# Altium PCB PCB1.PcbDoc (part 2 of 2)
Units mil, origin at the board's own origin, x right, y up, seen from the top; angles counter-clockwise.
Board outline 6000 x 4000 mil, 2 copper layers (Top Layer, Bottom Layer); 229 components, 170 nets, 796 pads, 0 vias.
Unrouted connection lines stored in the file: 461.
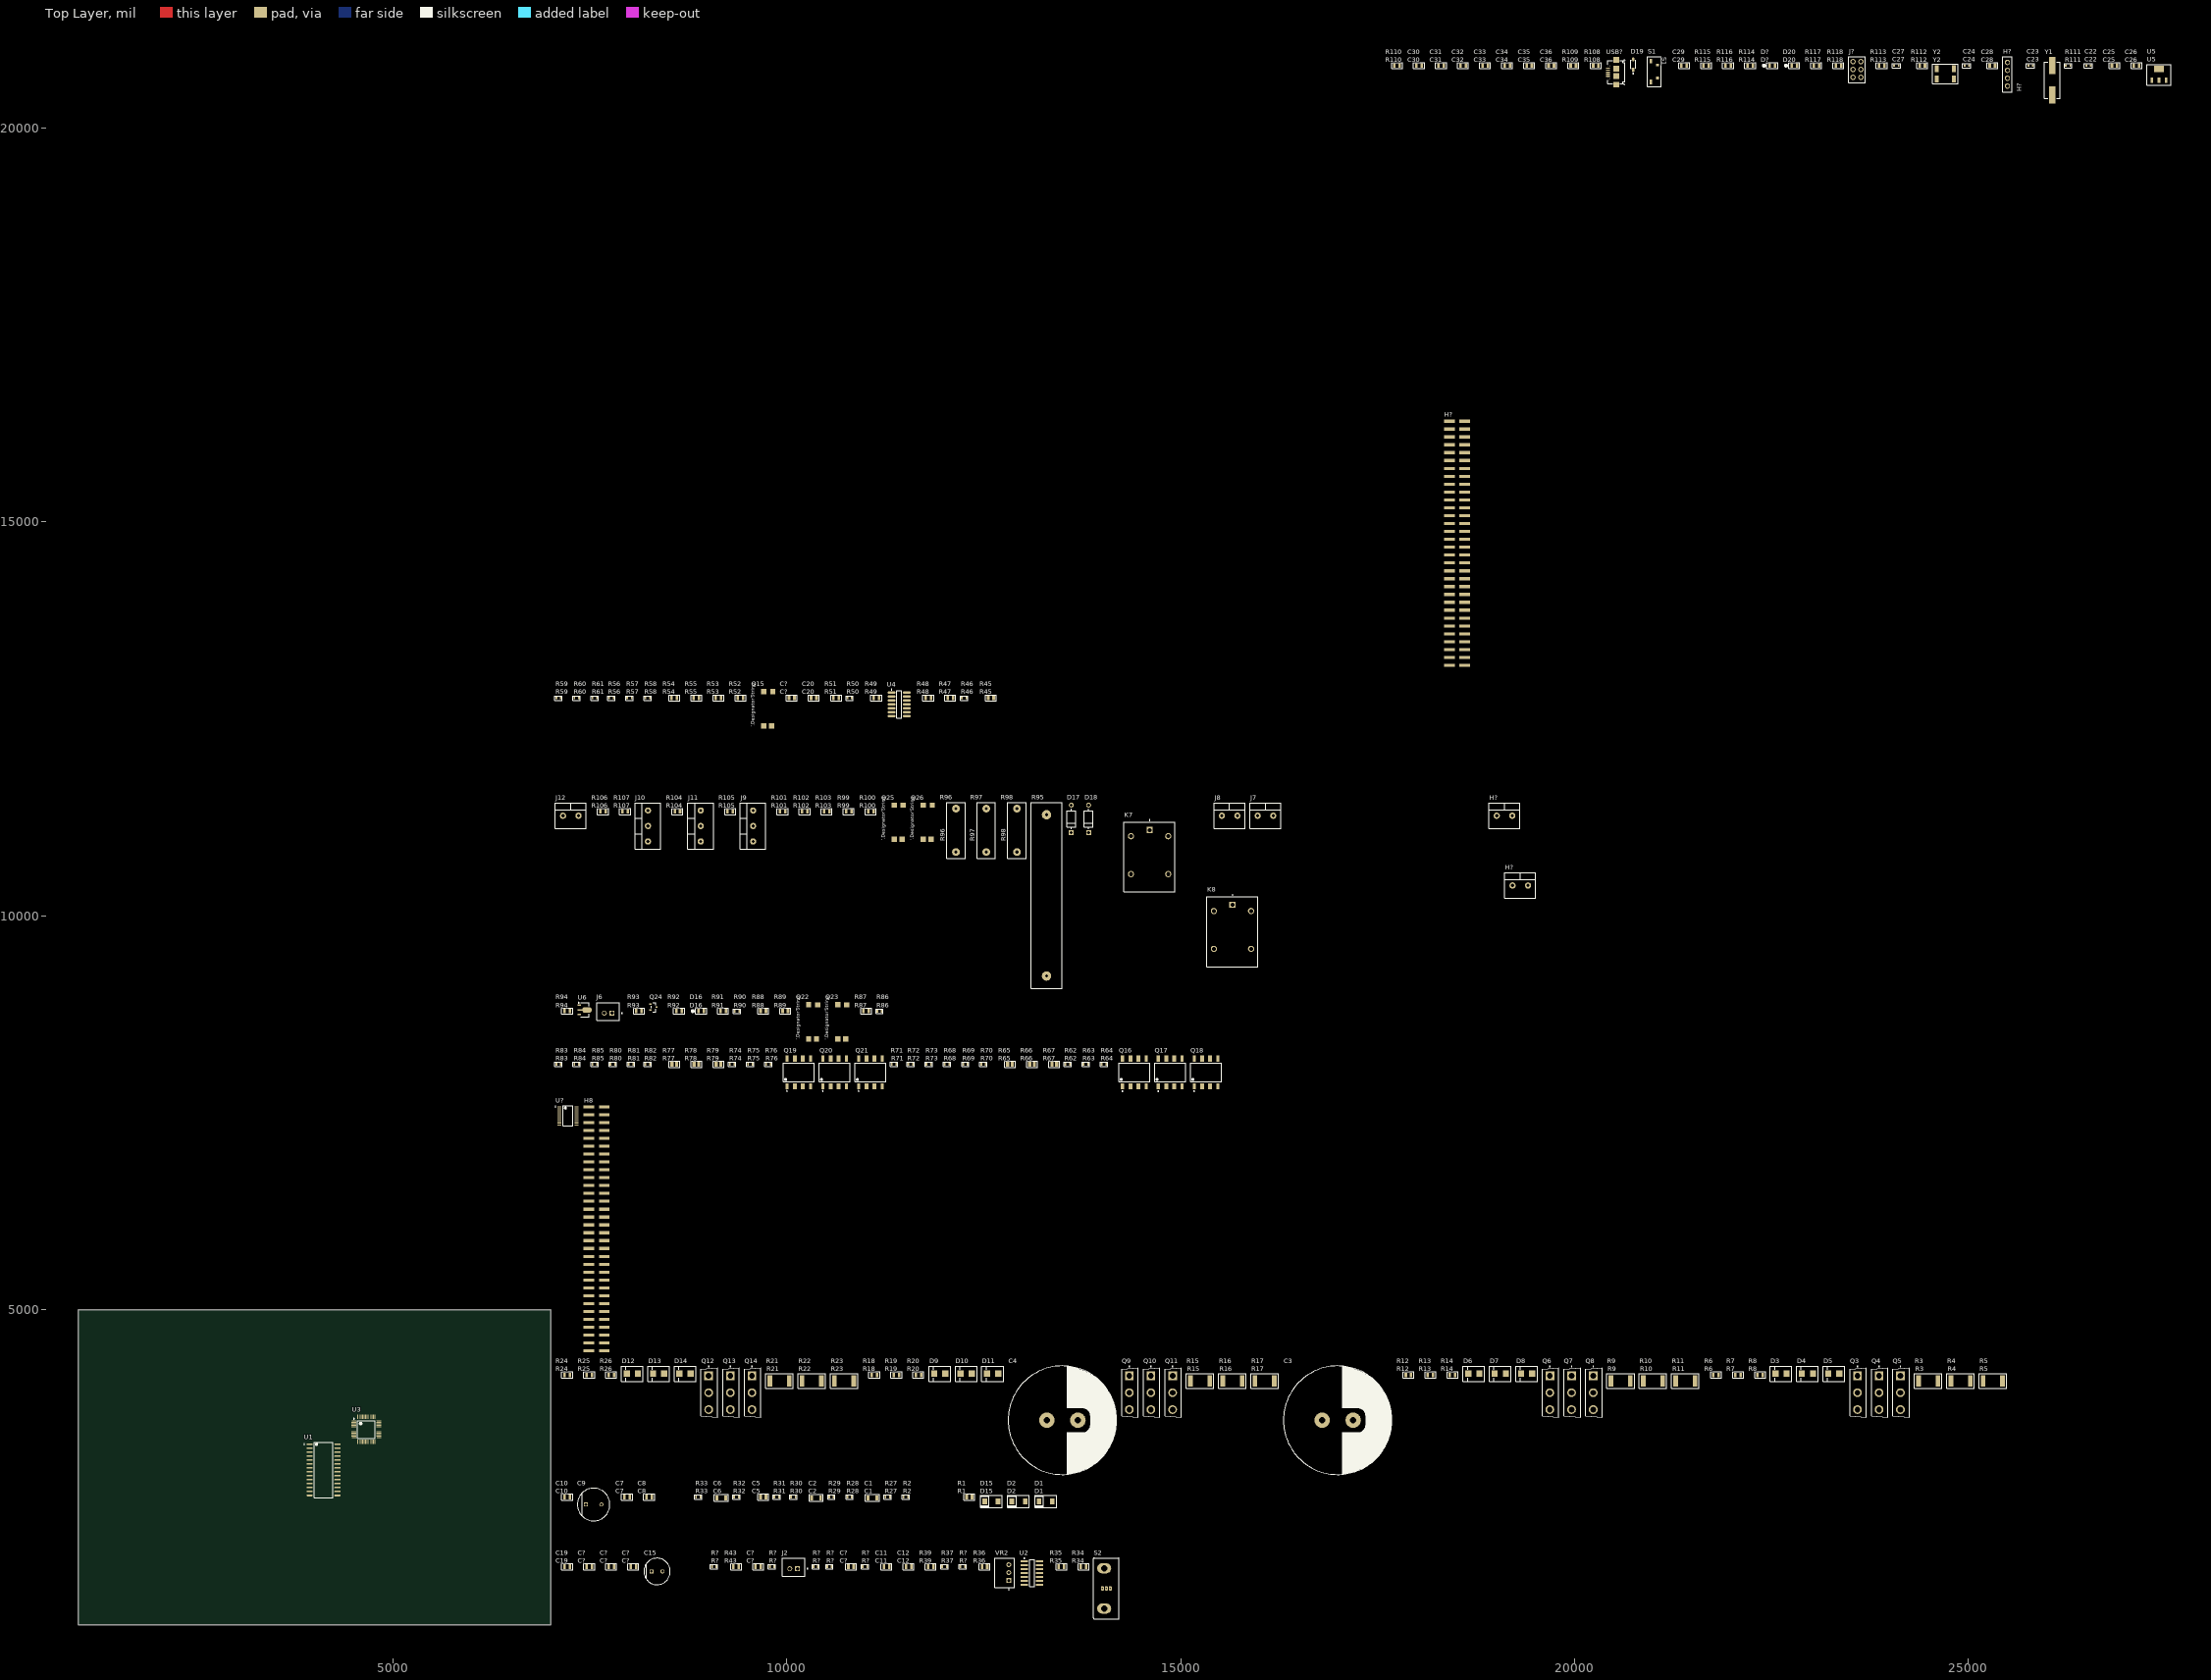
[diagram p0: Top Layer view]

## Part data (continued)
U6: library part CMP-0244-00387-1, "78L12 – 12V 150mA Positive Voltage Regulator-SOT-89 Package", ComponentLink1Description="Manufacturer URL", ComponentLink1URL=http://www.st.com, ComponentLink2Description=Datasheet, ComponentLink2URL=http://www.st.com/internet/com/TECHNICAL_RESOURCES/TECHNICAL_LITERATURE/DATASHEET/CD00000446.pdf, Datasheet=https://drive.google.com/file/d/1zOSy_FqMAdv1iXKmyJwn0G3RjMYeVW2a/view?usp=sharing, DatasheetVersion=1/02/2011, PackageDescription="3-Pin SOT-89 Package 1.5 mm Pitch, 4.1 mm Lead Span", PackageReference=SOT-89, PackageVersion=2011, Price per piece=13.32, Product URL=https://sharvielectronics.com/product/78l12-12v-150ma-positive-voltage-regulator-sot-89-package/
U?: library part CMP-2000-04956-2, "IC TRNSLTR BIDIRECTIONAL 20TSSOP", Case/Package=TSSOP, High Level Output Current=-50mA, Low Level Output Current=50mA, Max Operating Temperature=85°C, Max Supply Voltage=5.5V, Min Operating Temperature=-40°C, Min Supply Voltage=1.2V, Nominal Supply Current=8uA, Output Current=620uA, Package Quantity=1, Quiescent Current=3uA, Contact Plating=Gold, Data Rate=60Mbps, Height=1.15mm, Lead Free="Lead Free", Length=6.5mm, Logic Function=Translator, Mount="Surface Mount", Number of Bits=8, Number of Channels=8, Number of Inputs=8, Number of Pins=20, Output Type=Voltage, Packaging="Tape and Reel", Propagation Delay=4.8ns, Radiation Hardening=No, REACH SVHC="No SVHC", Rise Time=6.3ns, RoHS Compliant=Yes, Series=-, Supply Current=8uA, Termination=SMD/SMT, Turn-On Delay Time=312ns, Weight=0.002716oz, Width=4.4mm
USB?: library part CMP-1502-03253-2, "Micro USB 2.0 B Type Connector 5 Pin SMD", Color=Black, Contact Resistance=30mΩ, Current Rating=1A, Flammability Rating="UL94 V-0", Insulation Resistance=1GΩ, Max Operating Temperature=105°C, Min Operating Temperature=-40°C, Operating Supply Voltage=30V, Connector Type=USB, Contact Material=Copper, Contact Plating=Gold, Datasheet=https://sharvielectronics.com/wp-content/uploads/2020/06/Micro-USB-2.0-B-type-5-Pin-Connector.pdf, Gender=Receptacle, Height=2.9mm, Lead Free="Lead Free", Length=5.9mm, Mount="Horizontal, Surface Mount", NexarPartId=19991173, Number of Contacts=5, Number of Pins=5, Number of Ports=1, Number of Positions=5, Orientation=Horizontal, Packaging="Tape and Reel", Plating=Nickel, Price per piece=12.45, Product URL=https://sharvielectronics.com/product/micro-usb-2-0-b-type-connector-5-pin-smd/, REACH SVHC=Unknown, RoHS=Compliant, Termination=Solder, USB Standard="USB 2.0", Voltage Rating=30V
VR2: library part CMP-2000-05078-1, "10K ohm Variable Resistor-Trimpot 3296 Package", Manufacturer=Bourns, Operating Temperature Range=-55Cto+125C, Package Description="3-Pin Surface Mount Device, Body 9.53 x 6.1 mm, Pitch 2.54 mm", Package Reference=3299W, Power Rating=500mW(1/2W), Resistance=10kOhms, Temperature Coefficient=100PPM/C, Tolerance=10%, Voltage Rating=300V, Adjustment=TopCrossed, Brand=Bourns, Datasheet=https://sharvielectronics.com/wp-content/uploads/2020/06/50K-ohm-Variable-Resistor-Trimpot-3296-Package.pdf, Datasheet URL=https://datasheet.ciiva.com/19482/769696-19482212.pdf, Datasheet Version=Sep-04, Element Type=Cermet, Length=10.03mm, Manufacturer URL=http://www.bourns.com/, Mounting=PanelMount, Packaging=Tube, Price per piece=11.23, Product=Multiturn, Product Category=TrimmerResistors-ThroughHole, Product Type=SquareTrimmingPotentiometer, Product URL=https://sharvielectronics.com/product/10k-ohm-variable-resistor-trimpot-3296-package/, Qualification=Commercial, RoHS=True, Series=3299, Taper=Linear, Termination Style=Pin, Tradename=Trimpot, Type=Trimmers, Unit Weight=0.035000oz, Width=9.53mm
Y1: library part CMP-2100-03639-1, "HC-49SMD 8MHz Surface Mount Crystal 20PF Oscillator – X49SM8MSD2SC", Case/Package=SMD/SMT, ESR (Equivalent Series Resistance)=80Ohm, Frequency Stability=50ppm, Frequency Tolerance=30ppm, Load Capacitance=20pF, Manufacturer="FOX Electronics", Max Operating Temperature=70degC, Min Operating Temperature=-20degC, Package Description="2-Pin Surface Mount Device, Body 5 x 11.7 mm", Package Quantity=1000, Package Reference=HC49SDLF, Datasheet URL=http://www.foxonline.com/pdfs/hc49sdlf.pdf, Datasheet Version=42064.0, Depth=5mm, Frequency=8MHz, Height=4.5mm, Lead Free=LeadFree, Length=11.7mm, Manufacturer URL=http://www.foxonline.com/, Mount=SurfaceMount, Number of Pins=2, Packaging=TapeandReel, Price per piece=9.5, Product URL=https://sharvielectronics.com/product/hc-49smd-8mhz-surface-mount-crystal-20pf-oscillator-x49sm8msd2sc/, Radiation Hardening=No, REACH SVHC=NoSVHC, RoHSCompliant=True, Series Resistance=80Ohm, Termination=SMD/SMT, Tolerance=50ppm, Width=5mm
Y2: "YSX306GA 32.768 Khz SMD Crystal", Datasheet=https://drive.google.com/file/d/15lCHrTLPlPWCqCXLaHcSvA8fcw05laDJ/view?usp=sharing, Price per piece=28.69, Product URL=https://sharvielectronics.com/product/ysx306ga-32-768-khz-smd-crystal/

## Nets (pads, with @x,y where several pads share a name; then routed paths per layer and width w, separated by ;. In a path a pad name is that pad's centre, name@x,y a point inside that pad or via, vN(x,y) a via of type N, cw(c..) or ccw(c..) an arc to the next point about the centre after c; other vN are vias at no path point)
+5V: C15.2 C19.1 C20.1 C34.1 C35.1 C36.1 C?.1@7455.55,1735 C?.1@7735.55,1735 C?.1@8015.55,1735 D17.1 D18.1 D19.1 H?.2@19211.46,10385 J2.2 J10.3 J11.3 J12.2 K7.2 K8.2 Q15.4 Q16.8 Q17.8 Q18.8 Q19.8 Q20.8 Q21.8 R35.2 R56.1 R57.1 R58.1 R68.2 R69.2 R70.2 R80.2 R81.2 R82.2 R86.2 R110.1 R?.2@9839.53,1735 R?.2@10569.53,1735 S2.1 U2.4 U4.4 U5.3 VR2.1
+48V: C3.1 C4.1 J8.1 Q3.2 Q4.2 Q5.2 Q6.2 Q7.2 Q8.2 R45.2
A_GND: H8.22 H8.30 H8.32 H8.38 H8.40 H8.42 H8.53 H8.55 H8.57 H8.59 H8.61 H8.63 Q25.2 Q26.2 R94.1
GATE_GND: C5.2 C7.1 C8.2 C9.1 C10.2 C11.2 C12.2 C15.1 C19.2 C20.2 C?.2 H?.1@19208.31,11270 H?.1@19408.31,10385 J6.2 J10.2 J11.2 J12.1 Q16.5 Q17.5 Q18.5 Q19.5 Q20.5 Q21.5 Q23.3 Q25.3 Q26.3 R39.1 R43.1 R55.1 R59.1 R60.1 R61.1 R92.1 R?.1@10960.47,1735 R?.2@9104.53,1735 S2.2 U1.12 U2.11 U4.11 U6.2 VR2.3
GND: C3.2 C4.2 C24.1 C25.2 C26.2 C27.1 C28.2 C29.2 C30.2 C31.2 C32.2 C33.2 C34.2 C35.2 C36.2 H?.1@25494.88,20835 Q9.3 Q10.3 Q11.3 Q12.3 Q13.3 Q14.3 R18.2 R19.2 R20.2 R24.2 R25.2 R26.2 R53.1 R54.1 R98.1 R112.2 R113.2 R115.1 S1.1@21051.22,20637.32 U1.13 U3.8 U3.23 U3.35 U3.47 U5.1 USB?.4 USB?.5 USB?.Shell
MCU_D_GND: D16.1 Q16.3 Q17.3 Q18.3 Q19.3 Q20.3 Q21.3 Q22.2 R71.1 R72.1 R73.1 R83.1 R84.1 R85.1 R106.1 R107.1
NetC1_1: C1.1 D15.1 U1.28
NetC2_1: C2.1 D2.1 U1.24
NetC5_1: C5.1 R1.2 U1.11
NetC6_1: C6.1 D1.1 U1.20
NetC11_1: C11.1 R35.1 R36.1 R39.2
NetC12_1: C12.1 R34.2 R37.1 U2.7
NetC22_1: C22.1 C23.1
NetC22_2: C22.2 R111.2 U3.5 Y1.1
NetC23_2: C23.2 R111.1 U3.6 Y1.2
NetC24_2: C24.2 U3.3 Y2.1
NetC27_2: C27.2 U3.4 Y2.4
NetC29_1: C29.1 R114.1 S1.2@21051.22,20802.68 U3.7
NetC?_1: C?.1@10025.55,12765 R46.1 R50.2 U4.1
NetD3_1: D3.1 D6.1 R3.1 R9.1 U1.27
NetD3_2: D3.2 Q3.1 R3.2 R6.1
NetD4_1: D4.1 D7.1 R4.1 R10.1 U1.23
NetD4_2: D4.2 Q4.1 R4.2 R7.1
NetD5_1: D5.1 D8.1 R5.1 R11.1 U1.19
NetD5_2: D5.2 Q5.1 R5.2 R8.1
NetD6_2: D6.2 Q6.1 R9.2 R12.1
NetD7_2: D7.2 Q7.1 R10.2 R13.1
NetD8_2: D8.2 Q8.1 R11.2 R14.1
NetD9_1: D9.1 D12.1 R15.1 R21.1 U1.16
NetD9_2: D9.2 Q9.1 R15.2 R18.1
NetD10_1: D10.1 D13.1 R16.1 R22.1 U1.15
NetD10_2: D10.2 Q10.1 R16.2 R19.1
NetD11_1: D11.1 D14.1 R17.1 R23.1 U1.14
NetD11_2: D11.2 Q11.1 R17.2 R20.1
NetD12_2: D12.2 Q12.1 R21.2 R24.1
NetD13_2: D13.2 Q13.1 R22.2 R25.1
NetD14_2: D14.2 Q14.1 R23.2 R26.1
NetD16_2: D16.2 Q23.2
NetD17_2: D17.2 K7.5 R96.2
NetD18_2: D18.2 K8.5 R97.2
NetD19_2: D19.2 USB?.1
NetD20_1: D20.1 R115.2
NetH8_19: H8.19 J9.3 R101.1
NetH8_20: H8.20 J9.2 R102.1
NetH8_21: H8.21 J9.1 R103.1
NetH8_29: H8.29 J10.1 R104.1 R106.2
NetH8_31: H8.31 J11.1 R105.1 R107.2
NetH8_41: H8.41 R37.2
NetH8_43: H8.43 R50.1
NetH8_47: H8.47 R93.1
NetH8_48: H8.48 R100.1
NetH8_49: H8.49 R99.1
NetH8_50: H8.50 R88.1
NetH8_51: H8.51 R89.2
NetH8_54: H8.54 R79.1
NetH8_56: H8.56 R77.1
NetH8_58: H8.58 R66.1
NetH8_60: H8.60 R78.1
NetH8_62: H8.62 R67.1
NetH8_64: H8.64 R65.1
NetH?_2: H?.2@25494.88,20735 R113.1 U3.34
NetH?_3: H?.3@25494.88,20635 R112.1 U3.37
NetJ2_1: J2.1 R43.2 R?.1@9780.47,1735 U2.10
NetJ6_1: J6.1 U6.1
NetJ7_1: J7.1 J7.2 K7.1
NetJ8_2: J8.2 K8.1
NetJ?_2: J?.2 R117.2
NetJ?_5: R118.1
NetK7_3: K7.3 R95.1
NetK8_3: K8.3 R98.2
NetQ15_1: Q15.1 R52.2 R53.2
NetQ15_2: Q15.2 R54.2
NetQ15_3: Q15.3 R55.2 U4.3
NetQ16_2: Q16.2 R62.1 R65.2 R71.2
NetQ16_6: Q16.6 R2.1
NetQ16_7: Q16.7 R68.1
NetQ17_2: Q17.2 R63.1 R66.2 R72.2
NetQ17_6: Q17.6 R27.1
NetQ17_7: Q17.7 R69.1
NetQ18_2: Q18.2 R64.1 R67.2 R73.2
NetQ18_6: Q18.6 R28.1
NetQ18_7: Q18.7 R70.1
NetQ19_2: Q19.2 R74.1 R77.2 R83.2
NetQ19_6: Q19.6 R29.1
NetQ19_7: Q19.7 R80.1
NetQ20_2: Q20.2 R75.1 R78.2 R84.2
NetQ20_6: Q20.6 R30.1
NetQ20_7: Q20.7 R81.1
NetQ21_2: Q21.2 R76.1 R79.2 R85.2
NetQ21_6: Q21.6 R31.1
NetQ21_7: Q21.7 R82.1
NetQ22_1: Q22.1 R88.2
NetQ22_3: Q22.3 R92.2
NetQ22_4: Q22.4 R90.1
NetQ23_1: Q23.1 R91.2
NetQ23_4: Q23.4 R89.1
NetQ24_1: Q24.1 R93.2 R94.2
NetQ24_2: Q24.2 U6.3
NetQ25_1: Q25.1 R99.2
NetQ25_4: Q25.4 R96.1
NetQ26_1: Q26.1 R100.2
NetQ26_4: Q26.4 R97.1
NetR2_2: R2.2 U1.2
NetR27_2: R27.2 U1.5
NetR28_2: R28.2 U1.3
NetR29_2: R29.2 U1.6
NetR30_2: R30.2 U1.4
NetR31_2: R31.2 U1.7
NetR32_1: R32.1 R86.1 R90.2
NetR32_2: R32.2 U1.10
NetR33_1: R33.1 R87.1 R91.1
NetR33_2: R33.2 U1.8
NetR34_1: R34.1 R36.2 U2.6
NetR45_1: R45.1 R47.1
NetR46_2: R46.2 U4.2
NetR47_2: R47.2 R48.2
NetR48_1: R48.1 R49.1
NetR49_2: R49.2 R51.1
NetR51_2: R51.2 R52.1
NetR56_2: R56.2 U4.9
NetR57_2: R57.2 U4.13
NetR58_2: R58.2 U4.6
NetR59_2: R59.2 U4.10
NetR60_2: R60.2 U4.12
NetR61_2: R61.2 U4.5
NetR108_1: R108.1 USB?.2
NetR108_2: R108.2 U3.32
NetR109_1: R109.1 USB?.3
NetR109_2: R109.2 R110.2 U3.33
NetR116_1: R116.1 U3.2
NetR117_1: R117.1 U3.44
NetR118_2: R118.2 U3.20
NetR?_1: R?.1@10510.47,1735 U2.13
NetR?_2: R?.2@11019.53,1735 R?.2@12259.53,1735 U1.9
NetS2_3: S2.3 U2.3 U2.5
NetU2_2: U2.2 VR2.2
NetU3_1: U3.1
NetU3_10: U3.10
NetU3_11: U3.11
NetU3_12: U3.12
NetU3_13: U3.13
NetU3_14: U3.14
NetU3_15: U3.15
NetU3_16: U3.16
NetU3_17: U3.17
NetU3_18: U3.18
NetU3_19: U3.19
NetU3_21: U3.21
NetU3_22: U3.22
NetU3_25: U3.25
NetU3_26: U3.26
NetU3_27: U3.27
NetU3_28: U3.28
NetU3_29: U3.29
NetU3_30: U3.30
NetU3_31: U3.31
NetU3_38: U3.38
NetU3_39: U3.39
NetU3_40: U3.40
NetU3_41: U3.41
NetU3_42: U3.42
NetU3_43: U3.43
NetU3_45: U3.45
NetU3_46: U3.46
PHASE_A: C1.2 Q3.3 Q6.3 Q9.2 Q12.2 R6.2 R12.2 U1.26
PHASE_B: C2.2 Q4.3 Q7.3 Q10.2 Q13.2 R7.2 R13.2 U1.22
PHASE_C: C6.2 Q5.3 Q8.3 Q11.2 Q14.2 R8.2 R14.2 U1.18
VCC_3V3: C25.1 C26.1 C28.1 C30.1 C31.1 C32.1 C33.1 D20.2 D?.2 H?.4@25494.88,20535 J?.1 R114.2 U3.9 U3.24 U3.36 U3.48 U5.2 U5.4
VCC_15V: C7.2 C8.1 C9.2 C10.1 D1.2 D2.2 D15.2 H?.2@19011.46,11270 Q24.3 R1.1 U1.1
VCC_MCU: R62.2 R63.2 R64.2 R74.2 R75.2 R76.2 R87.2 R101.2 R102.2 R103.2 R104.2 R105.2
pads on no net: C?.1@9600.55,1735 C?.1@10780.55,1735 D?.1 H8.1 H8.2 H8.3 H8.4 H8.5 H8.6 H8.7 H8.8 H8.9 H8.10 H8.11 H8.12 H8.13 H8.14 H8.15 H8.16 H8.17 H8.18 H8.23 H8.24 H8.25 H8.26 H8.27 H8.28 H8.33 H8.34 H8.35 H8.36 H8.37 H8.39 H8.44 H8.45 H8.46 H8.52 H?.1@18604.88,13180 H?.2@18604.88,13280 H?.3@18604.88,13380 H?.4@18604.88,13480 H?.5 H?.6 H?.7 H?.8 H?.9 H?.10 H?.11 H?.12 H?.13 H?.14 H?.15 H?.16 H?.17 H?.18 H?.19 H?.20 H?.21 H?.22 H?.23 H?.24 H?.25 H?.26 H?.27 H?.28 H?.29 H?.30 H?.31 H?.32 H?.33 H?.34 H?.35 H?.36 H?.37 H?.38 H?.39 H?.40 H?.41 H?.42 H?.43 H?.44 H?.45 H?.46 H?.47 H?.48 H?.49 H?.50 H?.51 H?.52 H?.53 H?.54 H?.55 H?.56 H?.57 H?.58 H?.59 H?.60 H?.61 H?.62 H?.63 H?.64 K7.4 K8.4 Q16.1 Q16.4 Q17.1 Q17.4 Q18.1 Q18.4 Q19.1 Q19.4 Q20.1 Q20.4 Q21.1 Q21.4 R116.2 R?.1@9045.47,1735 R?.1@10335.47,1735 R?.1@12200.47,1735 R?.2@10394.53,1735 S1.1@21009.88,20674.72 S1.2@21009.88,20765.28 S1.3 S2.4 S2.5 U1.17 U1.21 U1.25 U2.1 U2.8 U2.9 U2.12 U2.14 U4.7 U4.8 U4.14 U?.1 U?.2 U?.3 U?.4 U?.5 U?.6 U?.7 U?.8 U?.9 U?.10 U?.11 U?.12 U?.13 U?.14 U?.15 U?.16 U?.17 U?.18 U?.19 U?.20 USB?.MH1 USB?.MH2 Y2.2 Y2.3

## Text inside footprints (layer, text, board x,y; h text height)
USB?: Mechanical 2 "PCB Edge" at 20612.56,20662.76 h16 r90